# Altium PCB Target Control Remote.PcbDoc
Units mm, origin at the board's own origin, x right, y up, seen from the top; angles counter-clockwise.
Board outline 68.73 x 78.18 mm, 2 copper layers (Top Layer, Bottom Layer), stack 1.569 mm thick; 54 components, 36 nets, 185 pads, 79 vias.
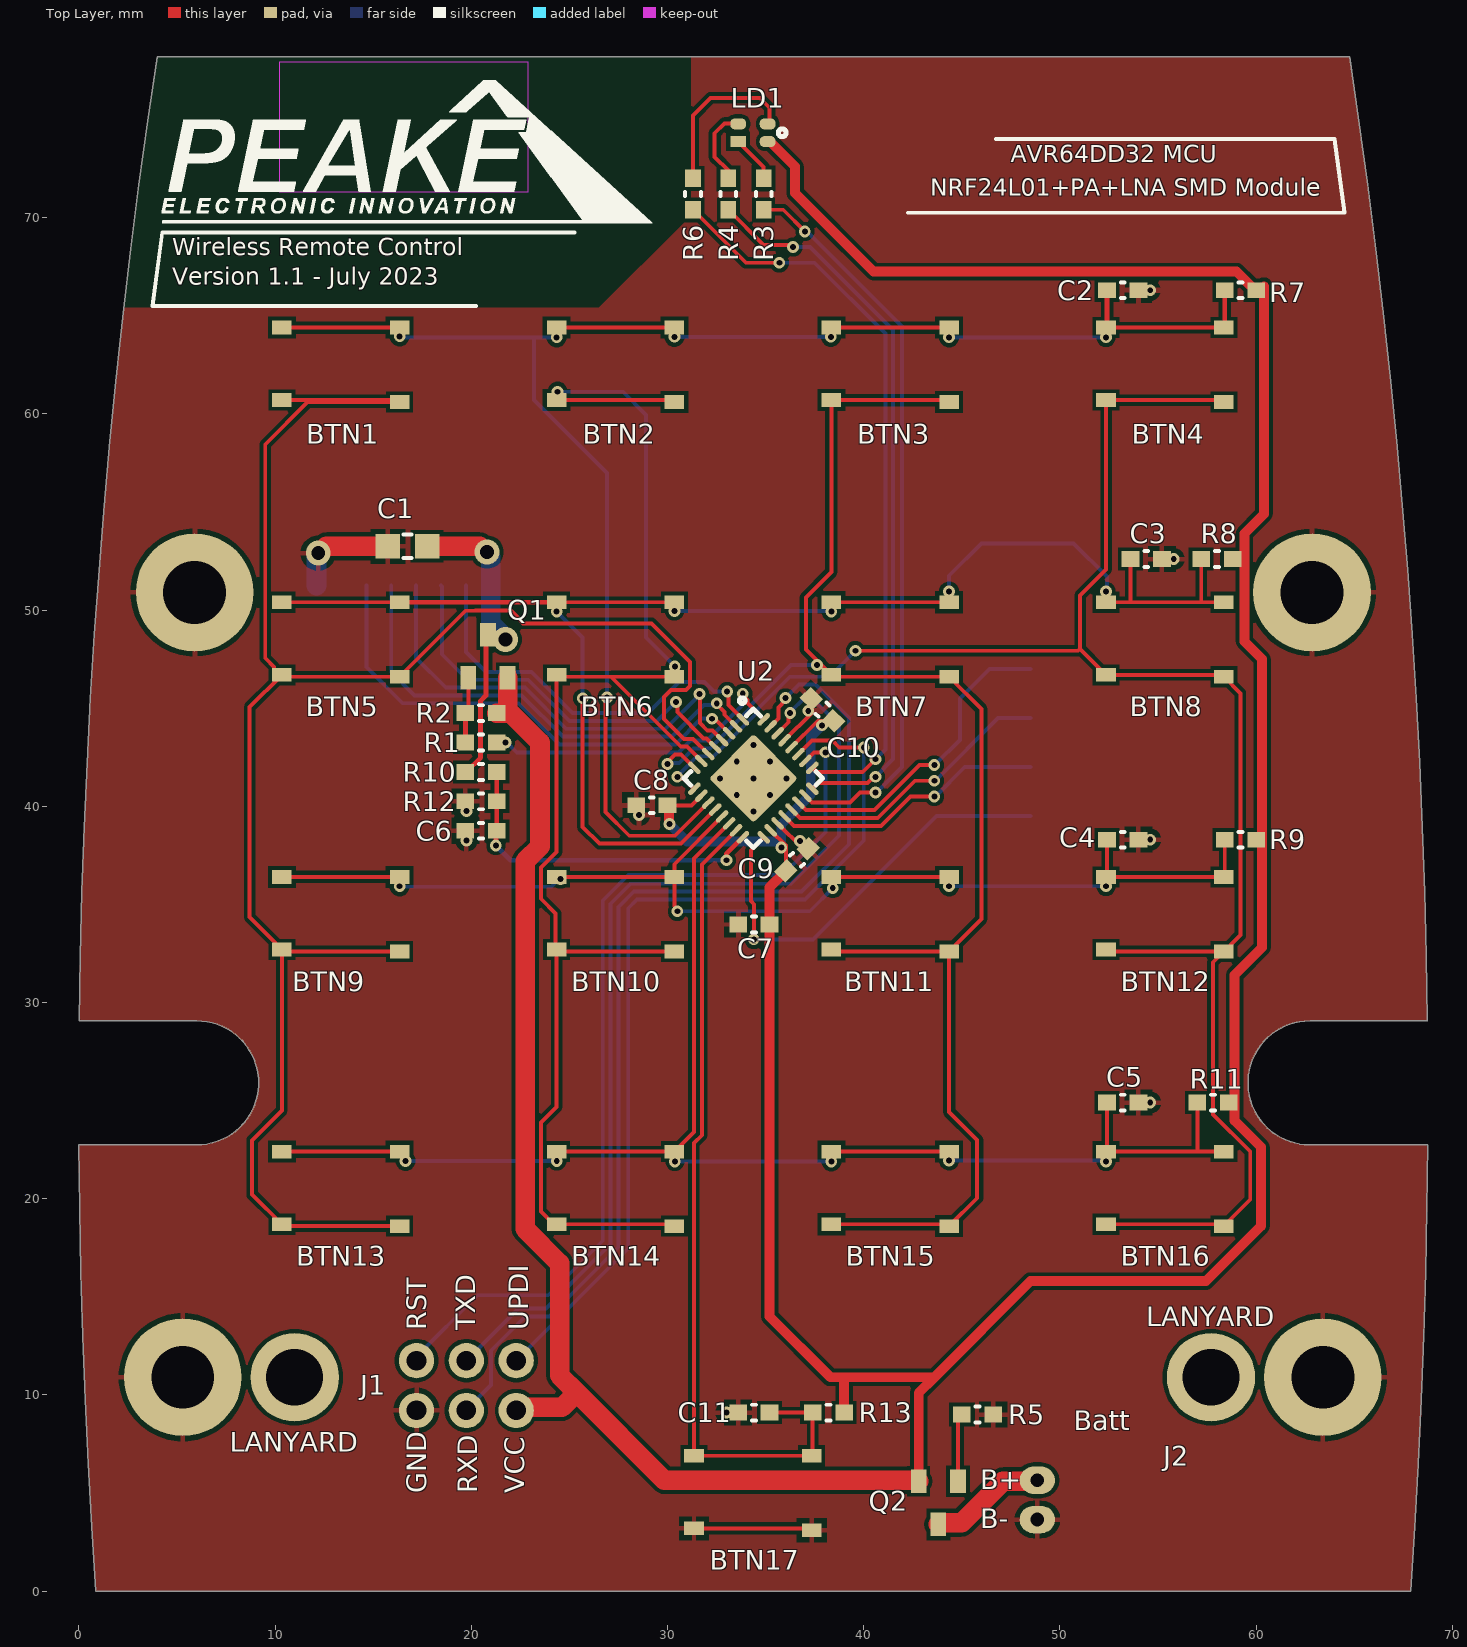
[diagram p0: Top Layer view]
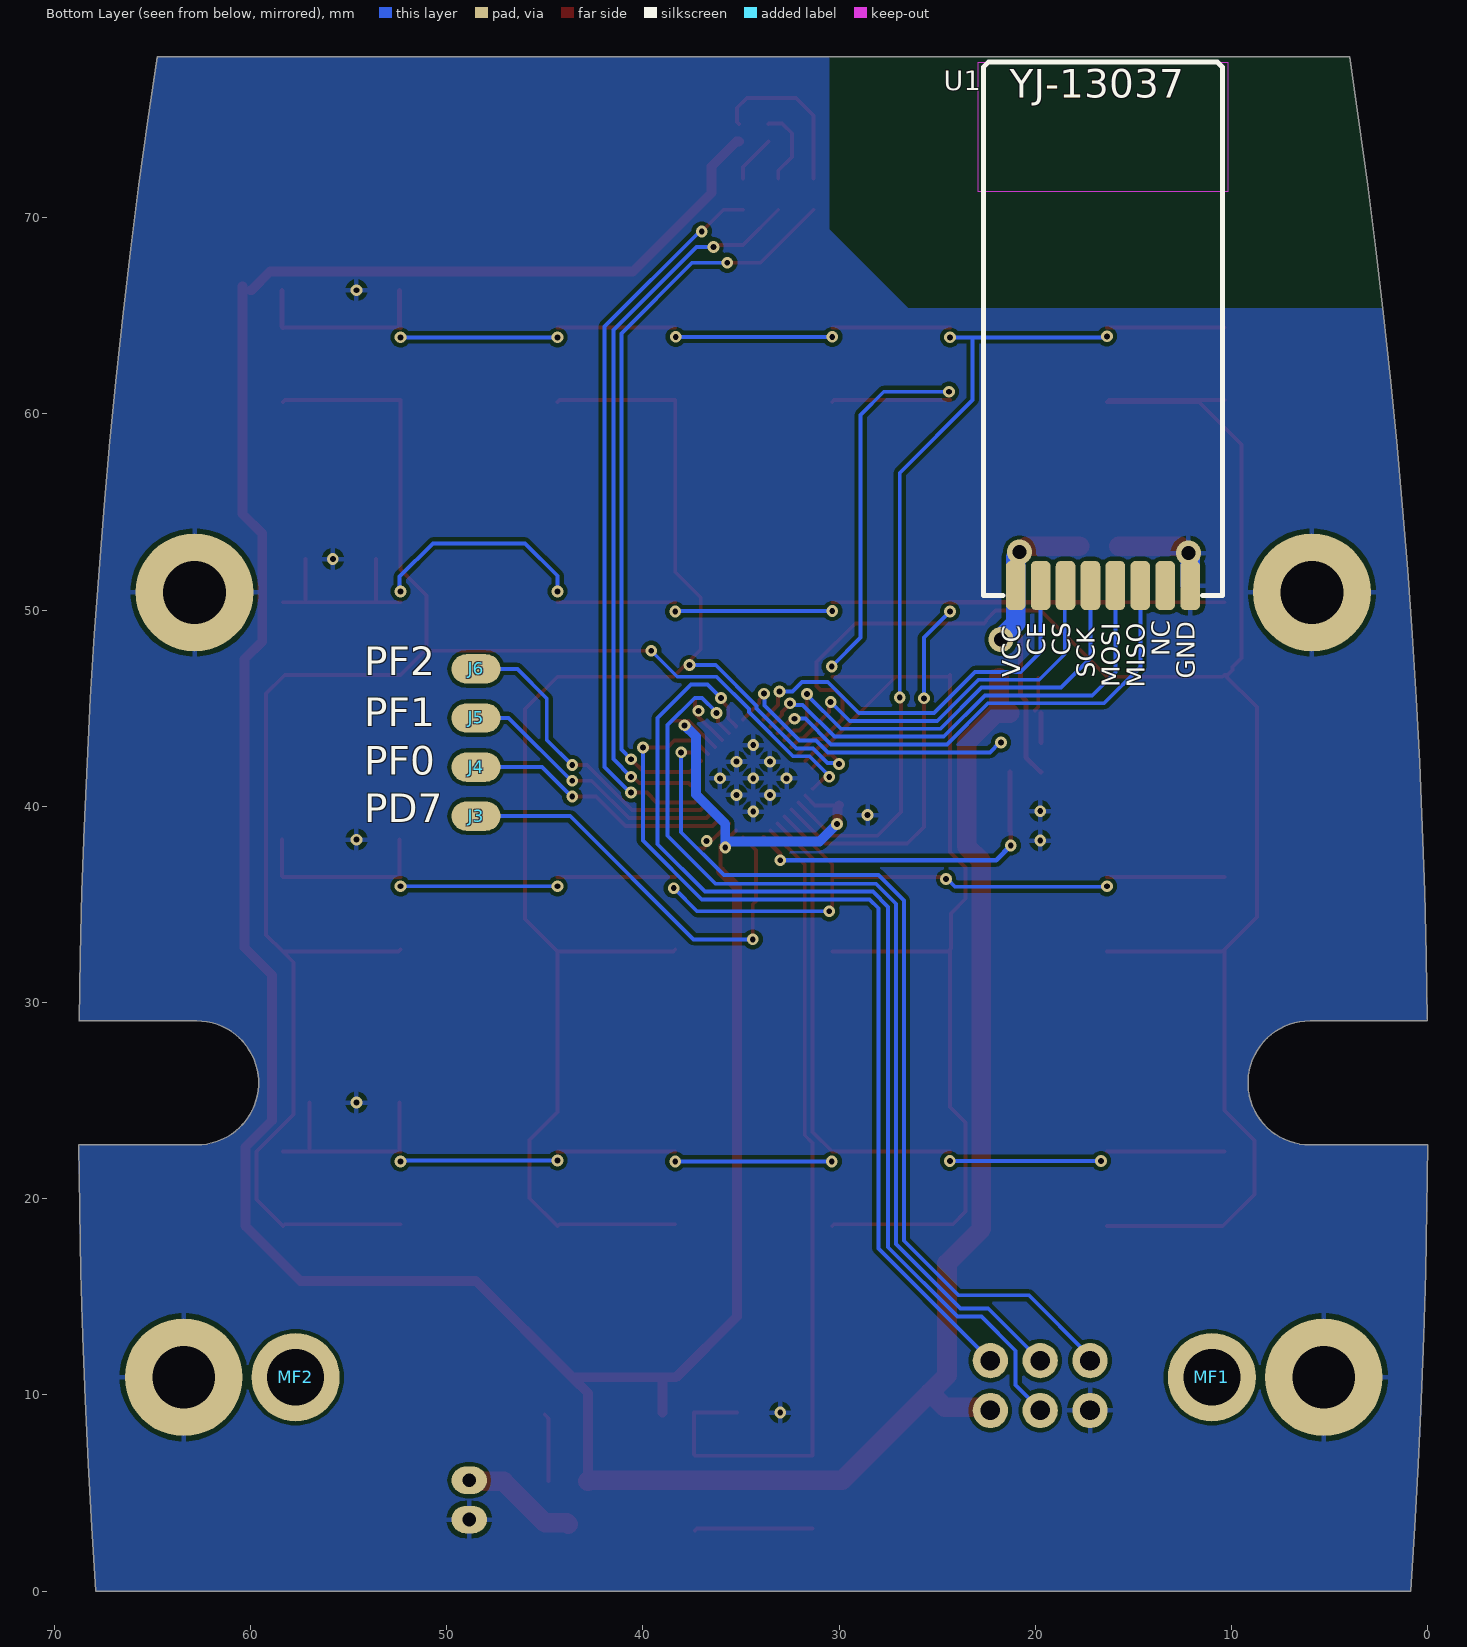
[diagram p1: Bottom Layer view, seen from below]
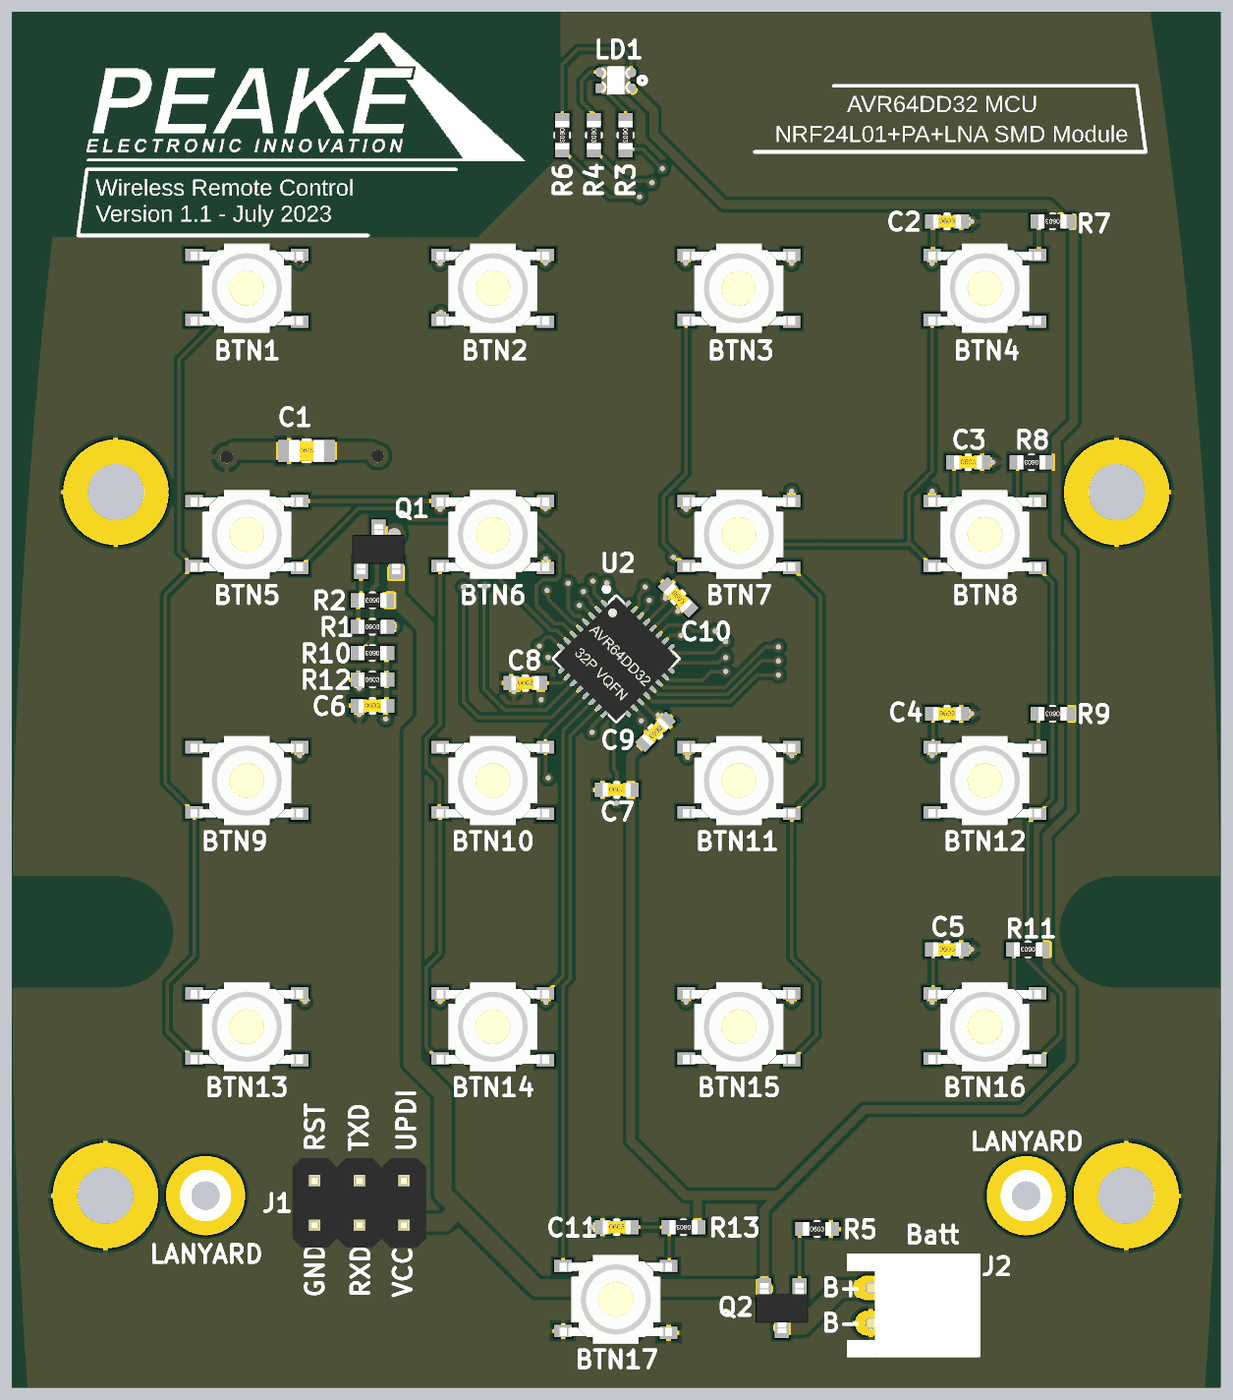
[diagram p2: 3D render of the assembled board from above, using the file's embedded part models]

## Layer stack, top to bottom
Top Solder: solder mask 0.0254, SM-001, Dk 4
Top Layer: signal copper 0.035
Dielectric 1: core 1.4986, Core-043, Dk 4.3
Bottom Layer: signal copper 0.035
Bottom Solder: solder mask 0.0254, SM-001, Dk 4

## Board outline
0.873,0.006 cw(c357.344,24.973) 0.006,22.743 5.998,22.743 ccw(c5.998,25.905) 5.998,29.068 0.023,29.068 cw(c357.344,24.973) 3.984,78.187 64.761,78.187 cw(c-288.599,24.973) 68.722,29.068 62.747,29.068 ccw(c62.747,25.905) 62.747,22.743 68.739,22.743 cw(c-288.599,24.973) 67.873,0.006

## Design rules (kind name [scope] priority, off if disabled: settings)
AssemblyTestPointUsage AssemblyTestPointUsage_1 [All] p2:
AssemblyTestpoint AssemblyTestpoint_1 [All] p2: testpointundercomponent=TRUE minsize=1.016 maxsize=2.54 preferedsize=1.524 minholesize=0 maxholesize=1.016 preferedholesize=0.813 testpointgrid=0.025 usegrid=TRUE gridtolerance=0 allowsidetop=TRUE allowsidebottom=TRUE
Clearance [All] p1: gap=0.2 ignorepadtopadclearanceinfootprint=FALSE
Clearance Clearance_1 [All] p2: gap=0.2 ignorepadtopadclearanceinfootprint=FALSE
ComponentClearance ComponentClearance_1 [All] p2: gap=0.254 collisioncheckmode=3 verticalgap=0.254 showdistances=FALSE
DiffPairsRouting DiffPairsRouting_1 [All] p2: maxlimit=0.254 minlimit=0.254 mostfreqgap=0.254 toplayer_minwidth=0.381 toplayer_maxwidth=0.381 toplayer_prefwidth=0.381 bottomlayer_minwidth=0.381 bottomlayer_maxwidth=0.381 bottomlayer_prefwidth=0.381 maxuncoupledlength=12.7
FabricationTestPointUsage FabricationTestPointUsage_1 [All] p2: valid=0 allowmultiple=FALSE
FabricationTestpoint FabricationTestpoint_1 [All] p2: side=3 testpointundercomponent=TRUE minsize=1.016 maxsize=2.54 preferedsize=1.524 minholesize=0 maxholesize=1.016 preferedholesize=0.813 testpointgrid=0.025 allowsidetop=TRUE allowsidebottom=TRUE usegrid=TRUE gridtolerance=0
FanoutControl Fanout_LCC [IsLCC] p1: bgadir=Out bgaviamode=Centered fanoutstyle=Auto fanoutdirection=Alternating viagrid=0.025 // Fanout_LCC (Default Rule)
FanoutControl Fanout_BGA [IsBGA] p2: bgadir=Out bgaviamode=Centered fanoutstyle=Auto fanoutdirection=Alternating viagrid=0.025 // Fanout_BGA (Default Rule)
FanoutControl Fanout_Default [All] p4: bgadir=Out bgaviamode=Centered fanoutstyle=Auto fanoutdirection=Alternating viagrid=0.025 // Fanout_Default (Default Rule)
FanoutControl Fanout_Small [(CompPinCount < 5)] p5: bgadir=Out bgaviamode=Centered fanoutstyle=Auto fanoutdirection=OutThenIn viagrid=0.025 // Fanout_Small (Default Rule)
FanoutControl Fanout_BGA_1 [IsBGA] p6: bgadir=Out bgaviamode=Centered fanoutstyle=Auto fanoutdirection=Alternating viagrid=0.025 // Fanout_BGA (Default Rule)
FanoutControl Fanout_LCC_1 [IsLCC] p7: bgadir=Out bgaviamode=Centered fanoutstyle=Auto fanoutdirection=Alternating viagrid=0.025 // Fanout_LCC (Default Rule)
FanoutControl Fanout_SOIC_1 [IsSOIC] p8: bgadir=Out bgaviamode=Centered fanoutstyle=Auto fanoutdirection=Alternating viagrid=0.025 // Fanout_SOIC (Default Rule)
FanoutControl Fanout_Small_1 [(CompPinCount < 5)] p9: bgadir=Out bgaviamode=Centered fanoutstyle=Auto fanoutdirection=OutThenIn viagrid=0.025 // Fanout_Small (Default Rule)
FanoutControl Fanout_Default_1 [All] p10: bgadir=Out bgaviamode=Centered fanoutstyle=Auto fanoutdirection=Alternating viagrid=0.025 // Fanout_Default (Default Rule)
Height Height_1 [All] p2: minheight=0 maxheight=25.4 prefheight=12.7
HoleSize HoleSize_1 [All] p1: absolutevalues=TRUE maxlimit=10 minlimit=0.3 maxpercent=80.000 minpercent=20.000
HoleToHoleClearance HoleToHoleClearance_1 [All] p2: gap=0.254 allowstackedmicrovias=TRUE
LayerPairs LayerPairs_1 [All] p2: enforce=TRUE
MinimumSolderMaskSliver [All] p1 off: minsoldermaskwidth=0.254
MinimumSolderMaskSliver MinimumSolderMaskSliver_1 [All] p2 off: minsoldermaskwidth=0.254
NetAntennae NetAntennae_1 [All] p2: netantennaetolerance=0
PasteMaskExpansion PasteMaskExpansion_1 [All] p2: expansion=0
PlaneClearance PlaneClearance_1 [All] p2: clearance=0.508
PlaneConnect PlaneConnect_1 [All] p2: planeconnectstyle=Relief reliefexpansion=0.508 reliefentries=4 reliefconductorwidth=0.254 reliefairgap=0.254
PolygonConnect [All] p1: connectstyle=Relief reliefconductorwidth=0.254 reliefentries=4 polygonreliefangle="90 Angle" airgapwidth=0.254
PolygonConnect PolygonConnect_1 [All] p2: connectstyle=Relief reliefconductorwidth=0.254 reliefentries=4 polygonreliefangle="90 Angle" airgapwidth=0.254
RoutingCorners RoutingCorners_1 [All] p2: cornerstyle=45-Degree minsetback=2.54 maxsetback=2.54
RoutingLayers RoutingLayers_1 [All] p2: top layer_v5=TRUE bottom layer_v5=TRUE
RoutingPriority RoutingPriority_1 [All] p2: routingpriority=0
RoutingTopology RoutingTopology_1 [All] p2: topology=Shortest
RoutingVias [All] p1: holewidth=0.3 width=0.6 viastyle="Through Hole" minholewidth=0.3 minwidth=0.6 maxholewidth=2 maxwidth=3
RoutingVias RoutingVias_1 [All] p2: holewidth=0.3 width=0.6 viastyle="Through Hole" minholewidth=0.3 minwidth=0.6 maxholewidth=3 maxwidth=6
ShortCircuit ShortCircuit_1 [All] p2: allowed=FALSE
SilkToBoardRegionClearance SilkToBoardRegionClearance_1 [All] p2:
SilkToSilkClearance [All] p1 off: silktosilkclearance=0.254
SilkToSilkClearance SilkToSilkClearance_1 [All] p2 off: silktosilkclearance=0.254
SilkToSolderMaskClearance [IsPad] p1: minsilkscreentomaskgap=0.01 clearancetoexposedcopper=TRUE
SilkToSolderMaskClearance SilkToSolderMaskClearance_1 [IsPad] p2 off: minsilkscreentomaskgap=0.254 clearancetoexposedcopper=TRUE
SolderMaskExpansion SolderMaskExpansion_1 [InPadClass('All Pads')] p1: expansion=0.102 istentingtop=FALSE
SolderMaskExpansion SolderMaskExpansion_via [All] p2: expansion=0.102 istentingtop=TRUE
UnRoutedNet UnRoutedNet_1 [All] p2:
UnpouredPolygon UnpouredPolygon_1 [All] p2:
Width [All] p1: maxlimit=5 minlimit=0.2 preferedwidth=0.25
Width Width_1 [All] p2: maxlimit=5 minlimit=0.2 preferedwidth=0.25
22 further rules are at their usual default settings.

## Classes and differential pairs
component class "Target Control Remote": BTN1 BTN2 BTN3 BTN4 BTN5 BTN6 BTN7 BTN8 BTN9 BTN10 BTN11 BTN12 BTN13 BTN14 BTN15 BTN16 BTN17 C1 C2 C3 C4 C5 C6 C7 C8 C9 C10 C11 J1 J2 J3 J4 J5 J6 LD1 MF1 Q1 Q2 R1 R2 R3 R4 R6 R8 R11 R13 U1 U2

## Components (designator, comment, footprint, x,y, rotation, side; value= is the part's Value field where it differs from the comment)
BTN1 "Button" "PTS526 SK15 SMTR2 LFS SMD Tactile Push Button" 13.35,62.5 r0 top locked
BTN2 "Button" "PTS526 SK15 SMTR2 LFS SMD Tactile Push Button" 27.35,62.5 r0 top locked
BTN3 "Button" "PTS526 SK15 SMTR2 LFS SMD Tactile Push Button" 41.35,62.5 r0 top locked
BTN4 "Button" "PTS526 SK15 SMTR2 LFS SMD Tactile Push Button" 55.35,62.5 r0 top locked
BTN5 "Button" "PTS526 SK15 SMTR2 LFS SMD Tactile Push Button" 13.35,48.5 r0 top locked
BTN6 "Button" "PTS526 SK15 SMTR2 LFS SMD Tactile Push Button" 27.35,48.5 r0 top locked
BTN7 "Button" "PTS526 SK15 SMTR2 LFS SMD Tactile Push Button" 41.35,48.5 r0 top locked
BTN8 "Button" "PTS526 SK15 SMTR2 LFS SMD Tactile Push Button" 55.35,48.5 r0 top locked
BTN9 "Button" "PTS526 SK15 SMTR2 LFS SMD Tactile Push Button" 13.35,34.5 r0 top locked
BTN10 "Button" "PTS526 SK15 SMTR2 LFS SMD Tactile Push Button" 27.35,34.5 r0 top locked
BTN11 "Button" "PTS526 SK15 SMTR2 LFS SMD Tactile Push Button" 41.35,34.5 r0 top locked
BTN12 "Button" "PTS526 SK15 SMTR2 LFS SMD Tactile Push Button" 55.35,34.5 r0 top locked
BTN13 "Button" "PTS526 SK15 SMTR2 LFS SMD Tactile Push Button" 13.35,20.5 r0 top locked
BTN14 "Button" "PTS526 SK15 SMTR2 LFS SMD Tactile Push Button" 27.35,20.5 r0 top locked
BTN15 "Button" "PTS526 SK15 SMTR2 LFS SMD Tactile Push Button" 41.35,20.5 r0 top locked
BTN16 "Button" "PTS526 SK15 SMTR2 LFS SMD Tactile Push Button" 55.35,20.5 r0 top locked
BTN17 "Button" "PTS526 SK15 SMTR2 LFS SMD Tactile Push Button" 34.35,5 r0 top locked
C1 "Capacitor" 0805_CAP 16.75,53.25 r0 top value=22uF
C2 "CMP-001-00172-1" 0603_CAP 53.2,66.3 r0 top value=100nF
C3 "Capacitor" 0603_CAP 54.4,52.6 r0 top value=100nF
C4 "Capacitor" 0603_CAP 53.2,38.3 r0 top value=100nF
C5 "Capacitor" 0603_CAP 53.2,24.9 r0 top value=100nF
C6 "Capacitor" 0603_CAP 20.5,38.75 r0 top value=10nF
C7 "Capacitor" 0603_CAP 34.4,33.975 r0 top value=10uF
C8 "Capacitor" 0603_CAP 29.2,40.05 r0 top value=100nF
C9 "Capacitor" 0603_CAP 36.6,37.275 r225 top value=100nF
C10 "Capacitor" 0603_CAP 37.9,44.925 r315 top value=100nF
C11 "Capacitor" 0603_CAP 34.4,9.1 r0 top value=100nF
J1 "Prog" DIP6 22.29,11.75 r270 top
J2 "Battery" "2mm RA S2B-PH-K-S" 48.85,4.65 r270 top
J3 "CMP-00044-2" "Prog Pad 1.5 x 2.5mm" 48.5,39.5 r270 bottom
J4 "CMP-00044-2" "Prog Pad 1.5 x 2.5mm" 48.5,42 r270 bottom
J5 "CMP-00044-2" "Prog Pad 1.5 x 2.5mm" 48.5,44.5 r270 bottom
J6 "CMP-00044-2" "Prog Pad 1.5 x 2.5mm" 48.5,47 r270 bottom
LD1 "LED_RGB_CA" LED_RGB_CA 34.35,74.325 r0 top
MF1 "M2 PCB nut" "PCB Nut M2-TH" 11,10.9 r180 bottom
MF2 "M2 PCB nut" "PCB Nut M2-TH" 57.7,10.9 r180 bottom (schematic designator MF1)
Q1 "PMOS" SOT-23-PMOS 20.85,47.65 r0 top
Q2 "PMOS" SOT-23-PMOS 43.8,4.5 r180 top
R1 "Resistor" 0603_RES 20.5,43.25 r0 top value=100R
R2 "Resistor" 0603_RES 20.5,44.75 r180 top value=10K
R3 "Resistor" 0603_RES 34.9,71.2 r270 top
R4 "Resistor" 0603_RES 33.1,71.2 r270 top
R5 "Resistor" 0603_RES 45.8,9 r0 top value=10K
R6 "Resistor" 0603_RES 31.3,71.2 r270 top
R7 "Resistor" 0603_RES 59.2,66.3 r180 top value=10K
R8 "Resistor" 0603_RES 58,52.6 r180 top value=10K
R9 "Resistor" 0603_RES 59.2,38.3 r180 top value=10K
R10 "Resistor" 0603_RES 20.5,41.75 r180 top value=30K
R11 "Resistor" 0603_RES 57.8,24.9 r180 top value=10K
R12 "Resistor" 0603_RES 20.5,40.25 r0 top value=10K
R13 "Resistor" 0603_RES 38.2,9.1 r180 top value=10K
U1 "nRF24L01+PA+LNA Ceramic Ant" "nRF24L01+PA+LNA Ceramic Antenna-Footprint-1" 16.555,51.25 r180 bottom
U2 "AVR64DD32" "32P VQFN" 34.375,41.425 r315 top

## Footprints (in the part's own frame and the unit in brackets; to place one, negate y for a bottom-side part, rotate by r counter-clockwise, add the part's x,y. Pads: shape width x height; smd on the part's side, far side on the other; paste and mask are expansions set on the pad)
"2mm RA S2B-PH-K-S" [mm] "JST right angle header"
  oval 1.4x1.8 hole 0.7: 1(-1,0) 2(1,0)
  body extent -2.95,-1.35 2.95,6.25, height 4.8
"32P VQFN" [mm] "AVRDD SERIES 32 PIN VQFN"
  oval 0.8x0.25 smd mask+0.05: 1(-2.5,1.75) 2(-2.5,1.25) 3(-2.5,0.75) 4(-2.5,0.25) 5(-2.5,-0.25) 6(-2.5,-0.75) 7(-2.5,-1.25) 8(-2.5,-1.75) 17(2.5,-1.75) 18(2.5,-1.25) 19(2.5,-0.75) 20(2.5,-0.25) 21(2.5,0.25) 22(2.5,0.75) 23(2.5,1.25) 24(2.5,1.75)
  oval 0.25x0.8 smd mask+0.05: 9(-1.75,-2.5) 10(-1.25,-2.5) 11(-0.75,-2.5) 12(-0.25,-2.5) 13(0.25,-2.5) 14(0.75,-2.5) 15(1.25,-2.5) 16(1.75,-2.5) 25(1.75,2.5) 26(1.25,2.5) 27(0.75,2.5) 28(0.25,2.5) 29(-0.25,2.5) 30(-0.75,2.5) 31(-1.25,2.5) 32(-1.75,2.5)
  rrect10% 3.2x3.2 smd mask+0.05: PAD(0,0)
  silkscreen extent -3.34,-2.5 2.5,2.54, body extent -2.5,-2.5 2.5,2.5, height 0.85
0603_CAP [mm] "SMD Capacitor 0603"
  rect 0.9x0.8 smd: 1(-0.8,0) 2(0.8,0)
  silkscreen extent -0.1,-0.4 0.1,0.4, body extent -0.8,-0.4 0.8,0.4, height 0.8
0603_RES [mm] "SMD Resistor 0603"
  rect 0.9x0.8 smd: 1(-0.8,0) 2(0.8,0)
  silkscreen extent -0.1,-0.4 0.1,0.4, body extent -0.8,-0.4 0.8,0.4, height 0.45
0805_CAP [mm] "SMD Capacitor 0805"
  rect 1.25x1.25 smd: 1(-1,0) 2(1,0)
  silkscreen extent -0.2,-0.6 0.2,0.6, body extent -1,-0.62 1,0.63, height 1.25
DIP6 [mm]
  round 1.8 hole 1: 1(0,0) 2(2.54,0) 3(0,-2.54) 4(2.54,-2.54) 5(0,-5.08) 6(2.54,-5.08)
  body extent -1.27,-6.35 3.81,1.27, height 8.5
LED_RGB_CA [mm] "Common Annode RGB LED"
  rect 0.8x0.55 smd: 1(-0.75,-0.45)
  rrect80% 0.8x0.55 smd: 2(-0.75,0.45) 3(0.75,0.45) 4(0.75,-0.45)
  silkscreen extent 1.3,-0.2 1.7,0.2, body extent -0.81,-0.8 0.81,0.8, height 0.35
"nRF24L01+PA+LNA Ceramic Antenna-Footprint-1" [mm]
  rrect50% 1x2.5 smd mask+0.05: 1(-4.445,0) 2(-3.175,0) 3(-1.905,0) 4(-0.635,0) 5(0.635,0) 6(1.905,0) 7(3.175,0) 8(4.445,0)
  Keep-Out Layer region: -6.35,26.67 6.35,26.67 6.35,20.066 -6.35,20.066
  silkscreen extent -6.1,-0.51 6.1,26.67, body extent -6,-0.51 6,26.49, height 2
"PCB Nut M2-TH" [mm] "Through hole mount"
  round 4.5 hole 2.9: 1(0,0)
  body extent -2.17,-2.16 2.18,2.16, height 3.5
"Prog Pad 1.5 x 2.5mm" [mm]
  oval 1.5x2.5 smd: 1(0,0)
"PTS526 SK15 SMTR2 LFS SMD Tactile Push Button" [mm]
  rect 1x0.7 smd: 1(-3,1.9) 1(3,1.9) 2(-3,-1.8) 2(3,-1.9)
  body extent -3.2,-2.55 3.2,2.55, height 1.55
SOT-23-PMOS [mm]
  rect 0.8x1.2 smd: 1(-1,-1.1) 2(1,-1.1) 3(0,1.1)
  body extent -1.5,-1.42 1.5,1.42, height 1.2

## Part data
BTN1 BTN2 BTN3 BTN4 BTN5 BTN6 BTN7 BTN8 BTN9 BTN10 BTN11 BTN12 BTN13 BTN14 BTN15 BTN16 BTN17: library part CMP-079-000142-1, "Momentary push button", Component Type=Standard, Design Item ID=Button, Pin Count=2, Pins=2, Source=Discrete.SchLib
C1 C3 C4 C5 C6 C7 C8 C9 C10 C11: library part CMP-001-00172-1, "SMD Capacitor", Component Type=Standard, Design Item ID=Capacitor, Pins=2, Source=Discrete.SchLib
C2: "SMD Capacitor", Component Type=Standard, Design Item ID=Capacitor, Pins=2, Source=Discrete.SchLib
J1: library part CMP-002-00180-1, "6 Pin Connector", Component Type=Standard, Design Item ID=6_Pin, Pin Count=6, Pins=6, Source=Connectors.SchLib
J2: library part CMP-002-00173-1, "2 Pin Connector", Component Type=Standard, Design Item ID=2_Pin, Pin Count=2, Pins=2, Source=Connectors.SchLib
J3 J4 J5 J6: library part CMP-079-000036-1, "Programmer pogo-pin interface pad (or test pad)", Component Type=Standard, Design Item ID=CMP-00044-2, Pin Count=1, Source="All Components - 30.06.23 - 18.27.SchLib"
LD1: library part CMP-007-00085-1, "Common Annode SMD RGB LED", Component Type=Standard, Design Item ID=LED_RGB_CA, Pins=4, Source=Discrete.SchLib
MF1 MF2: library part CMP-014-000014-1, "SMD or through hole soldered PCB nut", Component Type=Standard, Design Item ID=CMP-00059-2, Length=4.9mm, MFN=SMTWE2035MTJ, Mount style=SMD, Pin Count=1, Source="All Components - 30.06.23 - 18.27.SchLib", Thread="M2 x 0.4"
Q1 Q2: library part CMP-079-000100-1, "P Channel MOSFET", Component Type=Standard, Design Item ID=PMOS, MFN=BSS308PE, Pin Count=3, Source=P-MOS.SchLib
R1 R2 R3 R4 R5 R6 R7 R8 R9 R10 R11 R12 R13: library part CMP-009-00356-1, "SMD Resistor", Component Type=Standard, Design Item ID=Resistor, Pins=2, Source=Discrete.SchLib
U1: library part CMP-082-000000-1, "nRF24L01+PA+LNA Ceramic Antenna SMD module YJ-13039", Design Item ID=CMP-00025-00003-2, Source=nRF24L01_Ceramic.SchLib
U2: library part CMP-031-00048-1, "AVR DD series 24MHz 8-bit 32 pin MCU 1.8-5.5V, multi voltage, 27 GPIO, 64K flash, 8K SRAM, 256b EEPROM.", Component Type=Standard, Design Item ID=CMP-00041-1, Pin Count=33, Source="All Components - 30.06.23 - 18.27.SchLib"

## Free pads (board coordinates)
  round 6 hole 3.2: ""(5.3,10.9) ""(5.9,50.9) ""(62.85,50.9) ""(63.4,10.9)

## Via types
v1: diameter 0.6, hole 0.3, Top Layer to Bottom Layer, tented both sides, 67 vias
v2: diameter 0.6, hole 0.3, Top Layer to Bottom Layer, tented bottom, 9 vias
v3: diameter 1.27, hole 0.711, Top Layer to Bottom Layer, tented both sides, 3 vias

## Nets (pads, with @x,y where several pads share a name; then routed paths per layer and width w, separated by ;. In a path a pad name is that pad's centre, name@x,y a point inside that pad or via, vN(x,y) a via of type N, cw(c..) or ccw(c..) an arc to the next point about the centre after c; other vN are vias at no path point)
BAT_VOLTS: C6.2 R10.1 R12.2 U2.16 | length 17.4
  Top Layer w0.25: v1(21.25,38) 21.25,38.7 C6.2 R10.1 ; v1(33,37.25) 33,37.575 U2.16
  Bottom Layer w0.25: v1(21.25,38) 22,37.25 v1(33,37.25)
BTN_CANCEL: BTN17.1 C11.2 R13.2 U2.15 | length 43.2
  Top Layer w0.2: U2.15 31.75,37.032 31.75,23.234 31.35,22.834 31.35,6.9 37.35,6.9 37.4,6.95 R13.2 C11.2
BTN_IN_R1: BTN1.1 BTN2.1 BTN3.1 BTN4.1 C2.1 R7.2 U2.11 | length 84
  Top Layer w0.2: BTN1.1@10.35,64.4 BTN1.1@16.35,64.4 ; BTN2.1@24.35,64.4 BTN2.1@30.35,64.4 ; v1(26.91,45.542) 26.85,45.483 26.85,39.7 28.05,38.5 30.389,38.5 U2.11 ; BTN3.1@38.35,64.4 BTN3.1@44.35,64.4 ; BTN4.1@52.35,64.4 BTN4.1@58.35,64.4
  Top Layer w0.25: BTN4.1@52.35,64.4 52.4,64.45 52.4,65.4 C2.1 ; BTN4.1@58.35,64.4 58.4,64.45 R7.2
  Bottom Layer w0.2: v1(16.35,63.95) 16.4,63.9 23.2,63.9 ; v1(24.35,63.9) 23.2,63.9 ; v1(26.91,45.542) 26.91,56.99 23.2,60.7 23.2,63.9 ; v1(30.35,63.925) v1(38.325,63.925) ; v1(44.35,63.9) v1(52.35,63.9)
BTN_IN_R2: BTN5.1 BTN6.1 BTN7.1 BTN8.1 C3.1 R8.2 U2.12 | length 74.8
  Top Layer w0.2: BTN5.1@10.35,50.4 BTN5.1@16.35,50.4 ; BTN6.1@24.35,50.4 BTN6.1@30.35,50.4 ; v1(25.675,45.5) 25.675,38.95 26.525,38.1 30.696,38.1 U2.12 ; BTN7.1@38.35,50.4 BTN7.1@44.35,50.4 ; BTN8.1@52.35,50.4 53.6,50.4 ; C3.1 53.6,50.4 ; R8.2 57.2,50.4 ; BTN8.1@58.35,50.4 57.2,50.4 ; 53.6,50.4 57.2,50.4
  Top Layer w0.25: BTN5.1@16.35,50.4 BTN6.1@24.35,50.4
  Bottom Layer w0.2: v1(24.35,49.925) 25.675,48.6 v1(25.675,45.5) ; v1(30.35,49.95) 38.325,49.95 v1(38.35,49.925) ; v1(44.35,50.95) 44.35,51.75 46,53.4 50.7,53.4 52.4,51.7 52.4,51 v1(52.35,50.95)
BTN_IN_R3: BTN9.1 BTN10.1 BTN11.1 BTN12.1 C4.1 R9.2 U2.13 | length 58.5
  Top Layer w0.2: BTN9.1@10.35,36.4 BTN9.1@16.35,36.4 ; BTN10.1@24.35,36.4 BTN10.1@30.35,36.4 ; v1(30.5,34.65) 30.5,34.758 30.35,34.908 BTN10.1@30.35,36.4 ; U2.13 30.35,37.046 BTN10.1@30.35,36.4 ; BTN11.1@38.35,36.4 BTN11.1@44.35,36.4 ; C4.1 52.4,36.45 52.35,36.4 58.35,36.4 58.4,36.45 R9.2
  Bottom Layer w0.2: v1(16.35,35.925) 16.375,35.9 24.091,35.9 24.484,36.293 v1(24.547,36.293) ; v1(30.5,34.65) 37.249,34.65 v1(38.424,35.826) ; v1(44.35,35.925) v1(52.35,35.925)
BTN_IN_R4: BTN13.1 BTN14.1 BTN15.1 BTN16.1 C5.1 R11.2 U2.14 | length 70.6
  Top Layer w0.2: BTN13.1@10.35,22.4 BTN13.1@16.35,22.4 ; BTN14.1@24.35,22.4 30.35,22.4 31.35,23.4 31.35,37.339 U2.14 ; BTN15.1@38.35,22.4 BTN15.1@44.35,22.4 ; C5.1 52.4,22.45 52.35,22.4 57,22.4 ; R11.2 57,22.4 ; BTN16.1@58.35,22.4 57,22.4
  Bottom Layer w0.2: v1(16.65,21.927) v1@24.354,21.927 ; v1(30.375,21.9) v1(38.35,21.9) ; v1(44.35,21.95) 52.3,21.95 v1(52.35,21.9)
  other v1: 24.355,21.928
BTN_OUT_C1: BTN1.2 BTN5.2 BTN9.2 BTN13.2 U2.6 | length 98.9
  Top Layer w0.2: BTN1.2@10.35,60.7 11.659,60.7 16.25,60.7 16.35,60.6 16.25,60.6 11.659,60.6 9.5,58.441 9.5,47.55 9.95,47.1 9.95,46.95 10.2,46.7 BTN5.2@10.35,46.7 ; BTN13.2@16.35,18.6 10.45,18.6 10.35,18.7 8.825,20.225 8.825,22.975 10.35,24.5 BTN9.2@10.35,32.7 ; BTN9.2@16.35,32.6 10.45,32.6 BTN9.2@10.35,32.7 ; U2.6 31.301,43.439 30.84,43.439 29.829,44.45 29.829,45.569 30.181,45.921 30.945,45.921 31.15,46.126 31.15,47.35 29.175,49.325 22.626,49.325 22.5,49.451 22.5,49.5 22.025,49.975 20.206,49.975 19.713,49.963 16.35,46.6 10.841,46.6 10.45,46.6 BTN5.2@10.35,46.7 ; BTN9.2@10.35,32.7 8.7,34.35 8.7,45.05 BTN5.2@10.35,46.7
BTN_OUT_C2: BTN2.2 BTN6.2 BTN10.2 BTN14.2 U2.7 | length 78.4
  Top Layer w0.2: BTN2.2@24.35,60.7 30.25,60.7 BTN2.2@30.35,60.6 ; BTN14.2@30.35,18.6 30.25,18.7 24.2,18.7 23.55,19.35 23.55,23.875 24.35,24.675 24.35,32.6 BTN10.2@24.35,32.7 ; BTN10.2@30.35,32.6 24.45,32.6 BTN10.2@24.35,32.7 ; BTN6.2@30.35,46.6 29.5,46.6 27.113,46.6 ; U2.7 30.994,43.039 30.675,43.039 27.113,46.6 ; BTN10.2@24.35,32.7 24.3,32.75 24.3,34.537 23.55,35.287 23.55,36.874 24.35,37.674 24.35,46.6 24.35,46.7 24.45,46.6 27.113,46.6
  Bottom Layer w0.2: v1(24.4,61.125) 27.725,61.125 28.9,59.95 28.9,48.6 v1(30.375,47.125)
BTN_OUT_C3: BTN3.2 BTN7.2 BTN11.2 BTN15.2 U2.8 | length 81.5
  Top Layer w0.2: v1(30,42.15) 30,42.25 30.389,42.639 30.686,42.639 U2.8 ; BTN15.2@38.35,18.7 44.25,18.7 44.35,18.6 45.775,20.025 45.775,23 44.35,24.425 BTN11.2@44.35,32.6 ; BTN11.2@38.35,32.7 38.45,32.6 BTN11.2@44.35,32.6 ; BTN3.2@44.35,60.6 44.25,60.7 38.35,60.7 38.35,51.95 37.05,50.65 37.05,48 38.35,46.7 38.45,46.6 44.35,46.6 46,44.95 46,34.25 BTN11.2@44.35,32.6
  Bottom Layer w0.2: v1(30,42.15) 30.065,42.215 30.6,42.215 31.335,42.95 32.175,42.95 34.199,44.974 34.199,45.113 36.286,47.2 v1(37.625,47.2)
BTN_OUT_C4: BTN4.2 BTN8.2 BTN12.2 BTN16.2 U2.9 | length 94
  Top Layer w0.2: v1(30.5,41.5) 30.577,41.423 30.805,41.423 31.336,40.893 31.337,40.895 U2.9 ; v1(39.575,47.925) 50.925,47.925 51.025,48.025 ; BTN16.2@52.35,18.7 58.25,18.7 58.35,18.6 59.7,19.95 59.7,22.4 57.8,24.3 57.8,32.05 BTN12.2@58.35,32.6 ; BTN12.2@52.35,32.7 52.45,32.6 BTN12.2@58.35,32.6 ; BTN4.2@58.35,60.6 58.25,60.7 52.35,60.7 52.35,52.075 51.025,50.75 51.025,48.025 ; 51.025,48.025 52.35,46.7 58.25,46.7 58.35,46.6 59.2,45.75 59.2,33.45 BTN12.2@58.35,32.6
  Bottom Layer w0.2: v1(30.5,41.5) 30.5,41.549 31.501,42.55 32.341,42.55 34.599,44.808 34.599,44.947 36.251,46.6 38.25,46.6 v1(39.575,47.925)
GND: BTN17.2 C1.1 C2.2 C3.2 C4.2 C5.2 C6.1 C7.1 C8.1 C9.1 C10.1 C11.1 J1.6 J2.2 pad. R5.2 R12.1 U1.8 U2.19 U2.29 U2.PAD | length 16.4
  Top Layer w0.2: BTN17.2@31.35,3.2 37.25,3.2 BTN17.2@37.35,3.1 ; U2.19 36.899,37.841 C9.1 ; U2.29 37.334,44.738 v1@37.334,44.865 ; v1(37.171,44.865) v1@37.334,44.865 ; C10.1 v1@37.334,44.865
  Top Layer w1: v3(12.2,52.9) 12.273,52.9 12.623,53.25 C1.1
  Bottom Layer w1: U1.8 12.11,52.737 12.2,52.827 v3(12.2,52.9)
  other v1: 33,9.1 54.6,24.9 36.75,38.225 19.75,38.25 54.6,38.3 28.55,39.55 19.75,39.75 55.8,52.6 54.6,66.3
  other v2: 34.375,39.728 33.526,40.576 35.224,40.576 32.678,41.425 34.375,41.425 36.072,41.425 33.526,42.274 35.224,42.274 34.375,43.122
LED_BLUE: R6.2 U2.25 | length 37.9
  Top Layer w0.2: R6.2 34,67.7 v1(35.7,67.7) ; U2.25 37.384,41.951 37.409,41.951 37.61,41.75 39.951,41.75 v1(40.6,42.399)
  Bottom Layer w0.2: v1(35.7,67.7) 37.5,67.7 41.1,64.1 41.1,42.899 v1(40.6,42.399)
LED_GREEN: R4.2 U2.24 | length 37.5
  Top Layer w0.2: R4.2 34.9,68.6 36.3,68.6 v1(36.4,68.5) ; U2.24 37.681,41.195 40.187,41.195 40.492,41.5 v1(40.6,41.5)
  Bottom Layer w0.2: v1(36.4,68.5) 37.266,68.5 41.5,64.266 41.5,42.4 v1(40.6,41.5)
LED_RED: R3.2 U2.23 | length 37.8
  Top Layer w0.2: R3.2 35.9,70.4 v1(37,69.3) ; U2.23 37.368,40.2 39.3,40.2 39.8,40.7 v1(40.6,40.7)
  Bottom Layer w0.2: v1(37,69.3) 37.1,69.3 41.949,64.451 41.949,42 40.649,40.7 v1(40.6,40.7)
MISO: U1.6 U2.3 | length 25.1
  Top Layer w0.2: v1(32.274,44.464) 32.351,44.387 32.474,44.387 U2.3
  Bottom Layer w0.2: U1.6 14.65,47.1 16.5,45.25 22.402,45.25 24.502,43.15 30.404,43.15 31.717,44.464 v1(32.274,44.464)
MOSI: U1.5 U2.2 | length 24.6
  Top Layer w0.2: v1(32.509,45.247) 32.509,45.2 32.904,44.805 32.904,44.664 U2.2
  Bottom Layer w0.2: U1.5 15.92,46.83 17.1,45.65 22.568,45.65 24.668,43.55 30.238,43.55 31.858,45.17 32.432,45.17 v1(32.509,45.247)
NetJ2_1: J2.1 Q2.3 | length 6
  Top Layer w1: Q2.3 43.881,3.481 44.981,3.481 47.1,5.6 48.8,5.6 J2.1
NetLD1_1: LD1.1 R3.1 | length 2.4
  Top Layer w0.2: LD1.1 34.9,72.575 R3.1
NetLD1_2: LD1.2 R4.1 | length 4
  Top Layer w0.2: R4.1 33.1,72.4 32.4,73.1 32.4,74.3 32.9,74.8 33.575,74.8 LD1.2
NetLD1_3: LD1.3 R6.1 | length 8.5
  Top Layer w0.2: R6.1 31.3,75.2 32.2,76.1 34.7,76.1 35.2,75.6 35.2,74.875 LD1.3
NetQ1_1: Q1.1 R1.1 R2.2 | length 3.2
  Top Layer w0.2: Q1.1 19.85,45.05 R2.2@20.025,44.875
  Top Layer w0.25: R1.1 R2.2
NetQ2_1: Q2.1 R5.1 | length 3.5
  Top Layer w0.2: Q2.1 44.8,8.8 R5.1
NRF_CE: U1.2 U2.1 | length 20.6
  Top Layer w0.2: v1(33.04,45.846) 33.109,45.776 33.109,45.166 U2.1
  Bottom Layer w0.2: U1.2 19.73,47.87 20.75,46.85 23.065,46.85 25.165,44.75 29,44.75 30.578,46.328 31.886,46.328 32.367,45.847 33.038,45.847 v1(33.04,45.846)
NRF_CS: U1.3 U2.5 | length 20.5
  Top Layer w0.2: v1(30.429,45.321) 30.506,45.244 30.506,44.799 31.841,43.464 31.983,43.464 U2.5
  Bottom Layer w0.2: U1.3 18.5,51.21 18.5,47.75 19.8,46.45 22.899,46.45 24.999,44.35 29.459,44.35 29.976,44.868 v1(30.429,45.321)
NRF_PS_EN: R1.2 U2.32 | length 15.6
  Top Layer w0.2: v1(33.832,45.739) 33.832,45.659 34.069,45.422 34.069,45.267 U2.32
  Bottom Layer w0.2: v1(21.75,43.25) 21.817,43.25 22.317,42.75 30.569,42.75 31.169,43.35 32.009,43.35 33.799,45.14 33.799,45.706 v1(33.832,45.739)
PIN_PD7: J3.1 U2.17 | length 22.2
  Top Layer w0.2: v1(34.4,33.218) 34.4,35.008 34.245,35.164 34.245,37.759 U2.17
  Bottom Layer w0.2: v1(34.4,33.218) 37.418,33.218 43.7,39.5 J3.1
PIN_PF0: J4.1 U2.20 | length 14
  Top Layer w0.2: U2.20 36.446,39 40.88,39 42.38,40.5 v1(43.6,40.5)
  Bottom Layer w0.2: v1(43.6,40.5) 43.649,40.5 45.149,42 J4.1
PIN_PF1: J5.1 U2.21 | length 14.5
  Top Layer w0.2: U2.21 36.754,39.4 40.714,39.4 42.614,41.3 v1(43.6,41.3)
  Bottom Layer w0.2: v1(43.6,41.3) 43.649,41.3 46.849,44.5 J5.1
PIN_PF2: J6.1 U2.22 | length 16.2
  Top Layer w0.2: U2.22 37.061,39.8 40.549,39.8 42.849,42.1 v1(43.6,42.1)
  Bottom Layer w0.2: v1(43.6,42.1) 43.614,42.1 44.9,43.386 44.9,45.5 46.4,47 J6.1
R\E\S\E\T\: J1.5 U2.26 | length 47.6
  Top Layer w0.2: U2.26 37.468,42.75 v1(38.05,42.75)
  Bottom Layer w0.2: J1.5 17.21,11.96 20.329,15.079 23.921,15.079 26.7,17.857 26.7,35.2 28,36.5 35.874,36.5 38.05,38.676 v1(38.05,42.75)
RX0: J1.4 U2.31 | length 55.1
  Top Layer w0.2: U2.31 35.259,44.09 35.65,44.481 35.65,45.042 36.015,45.406 v1(36.015,45.515)
  Bottom Layer w0.2: J1.4 19.75,9.25 21,10.5 21,12.25 22.75,14 23.974,14 27.5,17.526 27.5,34.869 28.281,35.65 36.834,35.65 39.25,38.066 39.25,44.5 37.55,46.2 36.7,46.2 v1(36.015,45.515)
SCK: U1.4 U2.4 | length 23.4
  Top Layer w0.2: v1(31.638,45.728) 31.647,45.719 31.647,44.243 32.026,43.864 32.29,43.864 U2.4
  Bottom Layer w0.2: U1.4 17.19,47.56 18.7,46.05 22.733,46.05 24.833,43.95 29.907,43.95 31.638,45.681 v1(31.638,45.728)
TX0: J1.3 U2.30 | length 50.6
  Top Layer w0.2: U2.30 36.173,44.284 36.173,44.673 v1(36.25,44.75)
  Bottom Layer w0.2: J1.3 22.4,14.4 23.809,14.4 27.1,17.691 27.1,35.034 28.116,36.05 36.3,36.05 38.75,38.5 38.75,44.134 37.358,45.526 36.983,45.526 36.25,44.793 v1(36.25,44.75)
UPDI: J1.1 U2.27 | length 47.4
  Top Layer w0.2: U2.27 37.361,43.35 38.401,43.35 38.751,43 v1(40,43)
  Bottom Layer w0.2: J1.1 28,17.46 28,34.803 28.447,35.25 37,35.25 40,38.25 v1(40,43)
VBAT: C7.2 C8.2 C9.2 C10.2 J1.2 LD1.4 Q1.2 Q2.2 R2.1 R7.1 R8.1 R9.1 R11.1 R13.1 U2.10 U2.18 U2.28 | length 222.1
  Top Layer w0.2: Q1.2 Q1.2@22.175,46.875 ; C8.2 31.232,40.05 U2.10 ; U2.18 36.034,37.998 C9.2 ; U2.28 37.663,44.359 C10.2
  Top Layer w0.5: C8.2 30.081,39.969 30.081,39.119 v1(30.1,39.1) ; LD1.4 35.225,73.875 36.5,72.6 36.5,71.25 40.5,67.25 59,67.25 59.95,66.3 R7.1 ; C9.2 35.2,35.875 C7.2 35.2,14 38.3,10.9 39,10.9 ; R13.1 39,10.9 ; Q2.2 42.8,10.1 43.6,10.9 ; R7.1@60.4,66.5 60.4,54.9 59.4,53.9 59.4,48.4 60.3,47.5 60.3,32.8 58.9,31.4 58.9,23.978 60.25,22.628 60.25,18.6 57.45,15.8 48.5,15.8 43.6,10.9 ; 39,10.9 43.6,10.9
  Top Layer w1: R2.1 22,44.75 23.5,43.25 23.5,37.956 22.75,37.206 22.75,18.46 24.5,16.71 24.5,11 25.375,10.125 ; 21.85,44.875 Q1.2 ; J1.2 22.443,9.363 24.613,9.363 25.375,10.125 ; Q2.2 42.75,5.65 29.85,5.65 25.375,10.125
  Bottom Layer w0.2: v1@37.875,44.076 v1(37.875,44.125)
  Bottom Layer w0.5: v1(30.1,39.1) 31,38.2 35.8,38.2 ; v1(35.8,37.9) 35.8,38.2 ; v1(37.875,44.125) 37.864,44.125 37.3,43.561 37.3,40.6 35.8,39.1 35.8,38.2
VNRF: C1.2 Q1.3 R10.2 U1.1 | length 15.5
  Top Layer w0.25: R10.2 19.75,41.75 20.475,42.475 20.475,43.785 20.475,45.38 20.75,45.655 20.75,48.65 Q1.3
  Top Layer w1: C1.2 20.437,53.25 20.727,52.96 v3(20.8,52.96)
  Bottom Layer w1: v3(20.8,52.96) 20.8,52.887 21,52.687 U1.1 21,49.323 21.75,48.573 v3(21.75,48.5)
pads on no net: MF1.1 MF2.1 U1.7

## Polygon pours and split planes (outlines as drawn)
GND on Top Layer "Top Layer-GND" (solid, pour order 0): 31.2,78.187 31.2,70.1 26.496,65.396 2.294,65.403 ccw(c357.341,24.973) 0.023,29.068 5.998,29.068 cw(c5.998,25.905) 5.998,22.743 0.006,22.743 ccw(c357.343,24.973) 0.873,0.006 67.873,0.006 ccw(c-288.601,24.973) 68.739,22.743 62.747,22.743 cw(c62.747,25.905) 62.747,29.068 68.722,29.068 ccw(c-288.6,24.972) 64.761,78.187
GND on Bottom Layer "Bottom Layer-GND" (solid, remove dead copper, pour order 1): 30.5,78.187 30.5,69.4 26.5,65.4 2.291,65.378 ccw(c357.344,24.973) 0.023,29.068 5.998,29.068 cw(c5.998,25.905) 5.998,22.743 0.006,22.743 ccw(c357.344,24.973) 0.873,0.006 67.873,0.006 ccw(c-288.599,24.973) 68.739,22.743 62.747,22.743 cw(c62.747,25.905) 62.747,29.068 68.722,29.068 ccw(c-288.599,24.972) 64.761,78.187
GND on Bottom Layer "GND_L02_P003" (solid, pour order 3): 32.25,41.275 32.25,41.575 34.225,43.55 34.525,43.55 36.5,41.575 36.5,41.275 34.525,39.3 34.225,39.3

## Silkscreen, mask and mechanical layers (free items; w line width, h text height)
Top Overlay:
  drawing of 32 lines, arcs and shapes, not listed
  text "AVR64DD32 MCU" at 47.5,72.517 h1.5
  text "NRF24L01+PA+LNA SMD Module" at 43.4,70.816 h1.5
  text "Wireless Remote Control" at 4.75,67.766 h1.5
  text "Version 1.1 - July 2023" at 4.751,66.282 h1.5
  text "LANYARD" at 54.4,13.5 h1
  text "RST" at 17.7,13.3 h1 r90
  text "TXD" at 20.2,13.3 h1 r90
  text "UPDI" at 22.9,13.3 h1 r90
  text "Batt" at 50.7,8.2 h1
  text "LANYARD" at 7.7,7.1 h1
  text "B+" at 45.95,5.2 h1
  text "GND" at 17.7,5 h1 r90
  text "RXD" at 20.3,5 h1 r90
  text "VCC" at 22.7,5 h1 r90
  text "B-" at 45.95,3.2 h1
Bottom Overlay:
  text "YJ-13037" at 21.3,75.628 h2.5
  text "CS" at 17.926,47.68 h1.6 r270
  text "CE" at 19.195,47.681 h1.6 r270
  text "NC" at 12.845,47.643 h1.6 r270
  text "VCC" at 20.465,46.582 h1.6 r270
  text "SCK" at 16.656,46.562 h1.6 r270
  text "GND" at 11.576,46.49 h1.6 r270
  text "PF2" at 54.2,46.2 h2.5
  text "MOSI" at 15.386,46.068 h1.6 r270
  text "MISO" at 14.116,46.032 h1.6 r270
  text "PF1" at 54.2,43.6 h2.5
  text "PF0" at 54.2,41.126 h2.5
  text "PD7" at 54.2,38.7 h2.5
Outline:
  the board outline again, w0.013